# Altium PCB Termo_DISPLAY_CPU_10_1.PcbDoc (part 2 of 2)
Units mil, origin at the board's own origin, x right, y up, seen from the top; angles counter-clockwise.
Board outline 3356.49 x 1466.72 mil, 2 copper layers (Top Layer, Bottom Layer); 43 components, 32 nets, 183 pads, 62 vias.
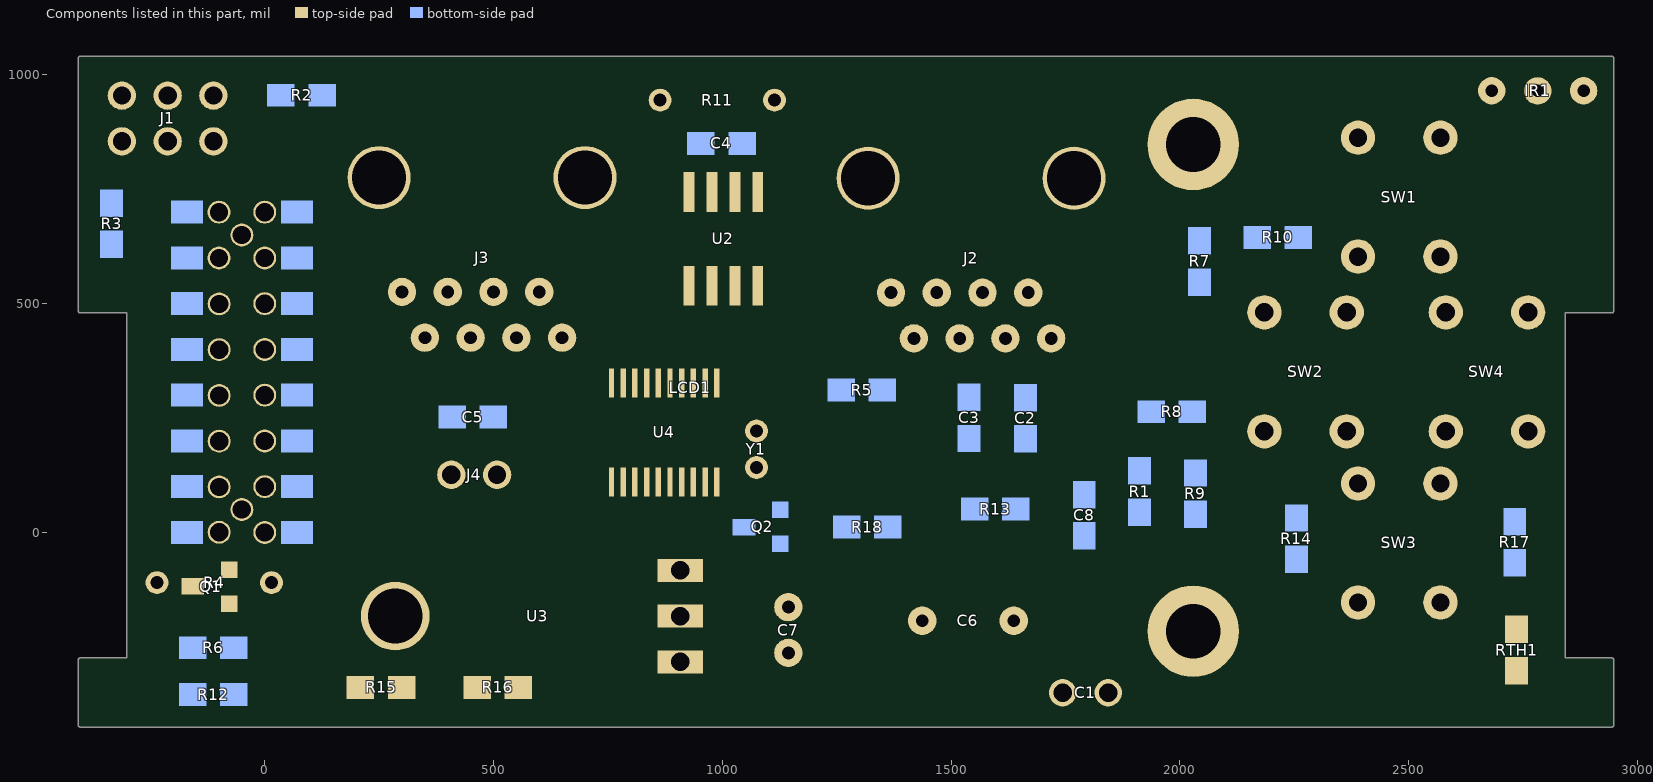
[diagram p2: the components of this part, seen from the top]

## Via types
v1: diameter 28, hole 14, Top Layer to Bottom Layer, 46 vias
v2: diameter 40, hole 20, Top Layer to Bottom Layer, 16 vias

## Nets (pads, with @x,y where several pads share a name; then routed paths per layer and width w, separated by ;. In a path a pad name is that pad's centre, name@x,y a point inside that pad or via, vN(x,y) a via of type N, cw(c..) or ccw(c..) an arc to the next point about the centre after c; other vN are vias at no path point) (continued)
copper on no net: | length 31434
  Bottom Layer w1: 2165.08,-316.72 2182.08,-316.72 ; 2165.08,-315.72 2182.08,-315.72 ; 2165.08,-314.72 2182.08,-314.72 ; 2165.08,-313.72 2182.08,-313.72 ; 2165.08,-312.72 2182.08,-312.72 ; 2165.08,-311.72 2182.08,-311.72 ; 2165.08,-310.72 2184.08,-310.72 ; 2165.08,-309.72 2184.08,-309.72 ; 2165.08,-308.72 2184.08,-308.72 ; 2165.08,-307.72 2184.08,-307.72 ; 2165.08,-306.72 2184.08,-306.72 ; 2168.08,-319.72 2169.08,-319.72 ; 2168.08,-318.72 2178.08,-318.72 ; 2168.08,-317.72 2178.08,-317.72 ; 2171.08,-305.72 2184.08,-305.72 ; 2171.08,-304.72 2184.08,-304.72 ; 2171.08,-303.72 2184.08,-303.72 ; 2171.08,-302.72 2184.08,-302.72 ; 2171.08,-301.72 2184.08,-301.72 ; 2171.08,-300.72 2184.08,-300.72 ; 2171.08,-299.72 2184.08,-299.72 ; 2171.08,-298.72 2184.08,-298.72 ; 2171.08,-297.72 2184.08,-297.72 ; 2171.08,-296.72 2184.08,-296.72 ; 2171.08,-295.72 2184.08,-295.72 ; 2171.08,-294.72 2184.08,-294.72 ; 2171.08,-293.72 2184.08,-293.72 ; 2171.08,-292.72 2184.08,-292.72 ; 2171.08,-291.72 2184.08,-291.72 ; 2171.08,-290.72 2184.08,-290.72 ; 2171.08,-289.72 2184.08,-289.72 ; 2171.08,-288.72 2184.08,-288.72 ; 2171.08,-287.72 2184.08,-287.72 ; 2171.08,-286.72 2184.08,-286.72 ; 2171.08,-285.72 2184.08,-285.72 ; 2171.08,-284.72 2184.08,-284.72 ; 2171.08,-283.72 2184.08,-283.72 ; 2171.08,-282.72 2184.08,-282.72 ; 2171.08,-281.72 2184.08,-281.72 ; 2171.08,-280.72 2184.08,-280.72 ; 2171.08,-279.72 2184.08,-279.72 ; 2171.08,-278.72 2184.08,-278.72 ; 2171.08,-277.72 2184.08,-277.72 ; 2171.08,-276.72 2184.08,-276.72 ; 2171.08,-275.72 2184.08,-275.72 ; 2171.08,-274.72 2184.08,-274.72 ; 2171.08,-273.72 2184.08,-273.72 ; 2171.08,-272.72 2184.08,-272.72 ; 2171.08,-271.72 2184.08,-271.72 ; 2171.08,-270.72 2184.08,-270.72 ; 2171.08,-269.72 2184.08,-269.72 ; 2171.08,-268.72 2184.08,-268.72 ; 2171.08,-267.72 2184.08,-267.72 ; 2171.08,-266.72 2184.08,-266.72 ; 2171.08,-265.72 2184.08,-265.72 ; 2171.08,-264.72 2184.08,-264.72 ; 2171.08,-263.72 2184.08,-263.72 ; 2171.08,-262.72 2184.08,-262.72 ; 2171.08,-261.72 2184.08,-261.72 ; 2171.08,-260.72 2184.08,-260.72 ; 2187.08,-306.72 2204.08,-306.72 ; 2187.08,-305.72 2202.08,-305.72 ; 2187.08,-304.72 2202.08,-304.72 ; 2187.08,-303.72 2200.08,-303.72 ; 2187.08,-302.72 2200.08,-302.72 ; 2187.08,-301.72 2200.08,-301.72 ; 2187.08,-300.72 2200.08,-300.72 ; 2187.08,-299.72 2200.08,-299.72 ; 2187.08,-298.72 2200.08,-298.72 ; 2187.08,-297.72 2200.08,-297.72 ; 2187.08,-296.72 2200.08,-296.72 ; 2187.08,-295.72 2200.08,-295.72 ; 2187.08,-294.72 2200.08,-294.72 ; 2187.08,-293.72 2200.08,-293.72 ; 2187.08,-292.72 2202.08,-292.72 ; 2187.08,-291.72 2202.08,-291.72 ; 2187.08,-290.72 2202.08,-290.72 ; 2189.08,-310.72 2224.08,-310.72 ; 2189.08,-309.72 2224.08,-309.72 ; 2189.08,-308.72 2224.08,-308.72 ; 2189.08,-307.72 2204.08,-307.72 ; 2189.08,-289.72 2202.08,-289.72 ; 2189.08,-288.72 2206.08,-288.72 ; 2189.08,-287.72 2206.08,-287.72 ; 2189.08,-286.72 2224.08,-286.72 ; 2191.08,-312.72 2222.08,-312.72 ; 2191.08,-311.72 2222.08,-311.72 ; 2191.08,-285.72 2222.08,-285.72 ; 2191.08,-284.72 2222.08,-284.72 ; 2191.08,-283.72 2222.08,-283.72 ; 2191.08,-282.72 2222.08,-282.72 ; 2193.08,-314.72 2220.08,-314.72 ; 2193.08,-313.72 2220.08,-313.72 ; 2193.08,-281.72 2218.08,-281.72 ; 2193.08,-280.72 2218.08,-280.72 ; 2195.08,-316.72 2218.08,-316.72 ; 2195.08,-315.72 2218.08,-315.72 ; 2197.08,-279.72 2216.08,-279.72 ; 2197.08,-278.72 2216.08,-278.72 ; 2201.08,-318.72 2212.08,-318.72 ; 2201.08,-317.72 2212.08,-317.72 ; 2207.08,-288.72 2224.08,-288.72 ; 2207.08,-287.72 2224.08,-287.72 ; 2209.08,-307.72 2224.08,-307.72 ; 2209.08,-306.72 2226.08,-306.72 ; 2211.08,-305.72 2226.08,-305.72 ; 2211.08,-304.72 2226.08,-304.72 ; 2211.08,-290.72 2226.08,-290.72 ; 2211.08,-289.72 2224.08,-289.72 ; 2213.08,-303.72 2226.08,-303.72 ; 2213.08,-302.72 2226.08,-302.72 ; 2213.08,-301.72 2226.08,-301.72 ; 2213.08,-300.72 2226.08,-300.72 ; 2213.08,-299.72 2226.08,-299.72 ; 2213.08,-298.72 2226.08,-298.72 ; 2213.08,-297.72 2226.08,-297.72 ; 2213.08,-296.72 2226.08,-296.72 ; 2213.08,-295.72 2226.08,-295.72 ; 2213.08,-294.72 2226.08,-294.72 ; 2213.08,-293.72 2226.08,-293.72 ; 2213.08,-292.72 2226.08,-292.72 ; 2213.08,-291.72 2226.08,-291.72 ; 2225.08,-284.72 2252.08,-284.72 ; 2225.08,-283.72 2252.08,-283.72 ; 2225.08,-282.72 2252.08,-282.72 ; 2225.08,-281.72 2252.08,-281.72 ; 2225.08,-280.72 2252.08,-280.72 ; 2225.08,-279.72 2238.08,-279.72 ; 2225.08,-278.72 2238.08,-278.72 ; 2227.08,-288.72 2252.08,-288.72 ; 2227.08,-287.72 2252.08,-287.72 ; 2227.08,-286.72 2252.08,-286.72 ; 2227.08,-285.72 2252.08,-285.72 ; 2237.08,-290.72 2252.08,-290.72 ; 2237.08,-289.72 2252.08,-289.72 ; 2239.08,-316.72 2252.08,-316.72 ; 2239.08,-315.72 2252.08,-315.72 ; 2239.08,-314.72 2252.08,-314.72 ; 2239.08,-313.72 2252.08,-313.72 ; 2239.08,-312.72 2252.08,-312.72 ; 2239.08,-311.72 2252.08,-311.72 ; 2239.08,-310.72 2252.08,-310.72 ; 2239.08,-309.72 2252.08,-309.72 ; 2239.08,-308.72 2252.08,-308.72 ; 2239.08,-307.72 2252.08,-307.72 ; 2239.08,-306.72 2252.08,-306.72 ; 2239.08,-305.72 2252.08,-305.72 ; 2239.08,-304.72 2252.08,-304.72 ; 2239.08,-303.72 2252.08,-303.72 ; 2239.08,-302.72 2252.08,-302.72 ; 2239.08,-301.72 2252.08,-301.72 ; 2239.08,-300.72 2252.08,-300.72 ; 2239.08,-299.72 2252.08,-299.72 ; 2239.08,-298.72 2252.08,-298.72 ; 2239.08,-297.72 2252.08,-297.72 ; 2239.08,-296.72 2252.08,-296.72 ; 2239.08,-295.72 2252.08,-295.72 ; 2239.08,-294.72 2252.08,-294.72 ; 2239.08,-293.72 2252.08,-293.72 ; 2239.08,-292.72 2252.08,-292.72 ; 2239.08,-291.72 2252.08,-291.72 ; 2241.08,-279.72 2252.08,-279.72 ; 2241.08,-278.72 2252.08,-278.72 ; 2253.08,-314.72 2278.08,-314.72 ; 2253.08,-313.72 2278.08,-313.72 ; 2253.08,-312.72 2278.08,-312.72 ; 2255.08,-311.72 2278.08,-311.72 ; 2255.08,-310.72 2278.08,-310.72 ; 2255.08,-309.72 2278.08,-309.72 ; 2255.08,-308.72 2278.08,-308.72 ; 2255.08,-307.72 2262.08,-307.72 ; 2255.08,-306.72 2262.08,-306.72 ; 2255.08,-284.72 2284.08,-284.72 ; 2255.08,-283.72 2284.08,-283.72 ; 2255.08,-282.72 2284.08,-282.72 ; 2255.08,-281.72 2284.08,-281.72 ; 2255.08,-280.72 2284.08,-280.72 ; 2255.08,-279.72 2284.08,-279.72 ; 2255.08,-278.72 2284.08,-278.72 ; 2257.08,-316.72 2276.08,-316.72 ; 2257.08,-315.72 2276.08,-315.72 ; 2257.08,-288.72 2284.08,-288.72 ; 2257.08,-287.72 2284.08,-287.72 ; 2257.08,-286.72 2284.08,-286.72 ; 2257.08,-285.72 2284.08,-285.72 ; 2261.08,-318.72 2272.08,-318.72 ; 2261.08,-317.72 2272.08,-317.72 ; 2265.08,-307.72 2278.08,-307.72 ; 2265.08,-306.72 2278.08,-306.72 ; 2265.08,-305.72 2278.08,-305.72 ; 2265.08,-304.72 2278.08,-304.72 ; 2265.08,-303.72 2278.08,-303.72 ; 2265.08,-302.72 2278.08,-302.72 ; 2265.08,-301.72 2278.08,-301.72 ; 2265.08,-300.72 2278.08,-300.72 ; 2265.08,-299.72 2278.08,-299.72 ; 2265.08,-298.72 2278.08,-298.72 ; 2265.08,-297.72 2278.08,-297.72 ; 2265.08,-296.72 2278.08,-296.72 ; 2265.08,-295.72 2278.08,-295.72 ; 2265.08,-294.72 2278.08,-294.72 ; 2265.08,-293.72 2278.08,-293.72 ; 2265.08,-292.72 2278.08,-292.72 ; 2265.08,-291.72 2278.08,-291.72 ; 2265.08,-290.72 2278.08,-290.72 ; 2265.08,-289.72 2278.08,-289.72 ; 2265.08,-277.72 2278.08,-277.72 ; 2265.08,-276.72 2278.08,-276.72 ; 2265.08,-275.72 2278.08,-275.72 ; 2265.08,-274.72 2278.08,-274.72 ; 2265.08,-273.72 2278.08,-273.72 ; 2265.08,-272.72 2278.08,-272.72 ; 2265.08,-271.72 2278.08,-271.72 ; 2265.08,-270.72 2278.08,-270.72 ; 2265.08,-269.72 2274.08,-269.72 ; 2265.08,-268.72 2274.08,-268.72 ; 2287.08,-316.72 2298.08,-316.72 ; 2287.08,-315.72 2298.08,-315.72 ; 2287.08,-314.72 2298.08,-314.72 ; 2287.08,-313.72 2298.08,-313.72 ; 2287.08,-312.72 2298.08,-312.72 ; 2287.08,-311.72 2298.08,-311.72 ; 2287.08,-310.72 2298.08,-310.72 ; 2287.08,-309.72 2298.08,-309.72 ; 2287.08,-308.72 2298.08,-308.72 ; 2287.08,-307.72 2298.08,-307.72 ; 2287.08,-306.72 2298.08,-306.72 ; 2287.08,-305.72 2298.08,-305.72 ; 2287.08,-304.72 2298.08,-304.72 ; 2287.08,-303.72 2298.08,-303.72 ; 2287.08,-302.72 2298.08,-302.72 ; 2287.08,-301.72 2298.08,-301.72 ; 2287.08,-300.72 2298.08,-300.72 ; 2287.08,-299.72 2298.08,-299.72 ; 2287.08,-298.72 2298.08,-298.72 ; 2287.08,-297.72 2298.08,-297.72 ; 2287.08,-296.72 2298.08,-296.72 ; 2287.08,-295.72 2298.08,-295.72 ; 2287.08,-294.72 2298.08,-294.72 ; 2287.08,-293.72 2298.08,-293.72 ; 2287.08,-292.72 2300.08,-292.72 ; 2287.08,-291.72 2300.08,-291.72 ; 2287.08,-290.72 2300.08,-290.72 ; 2287.08,-289.72 2300.08,-289.72 ; 2287.08,-288.72 2322.08,-288.72 ; 2287.08,-287.72 2322.08,-287.72 ; 2287.08,-286.72 2322.08,-286.72 ; 2287.08,-285.72 2322.08,-285.72 ; 2287.08,-284.72 2322.08,-284.72 ; 2289.08,-283.72 2322.08,-283.72 ; 2289.08,-282.72 2322.08,-282.72 ; 2289.08,-281.72 2322.08,-281.72 ; 2289.08,-280.72 2322.08,-280.72 ; 2293.08,-279.72 2308.08,-279.72 ; 2293.08,-278.72 2308.08,-278.72 ; 2307.08,-290.72 2322.08,-290.72 ; 2307.08,-289.72 2322.08,-289.72 ; 2311.08,-316.72 2322.08,-316.72 ; 2311.08,-315.72 2322.08,-315.72 ; 2311.08,-314.72 2322.08,-314.72 ; 2311.08,-313.72 2322.08,-313.72 ; 2311.08,-312.72 2322.08,-312.72 ; 2311.08,-311.72 2322.08,-311.72 ; 2311.08,-310.72 2322.08,-310.72 ; 2311.08,-309.72 2322.08,-309.72 ; 2311.08,-308.72 2322.08,-308.72 ; 2311.08,-307.72 2322.08,-307.72 ; 2311.08,-306.72 2322.08,-306.72 ; 2311.08,-305.72 2322.08,-305.72 ; 2311.08,-304.72 2322.08,-304.72 ; 2311.08,-303.72 2322.08,-303.72 ; 2311.08,-302.72 2322.08,-302.72 ; 2311.08,-301.72 2322.08,-301.72 ; 2311.08,-300.72 2322.08,-300.72 ; 2311.08,-299.72 2322.08,-299.72 ; 2311.08,-298.72 2322.08,-298.72 ; 2311.08,-297.72 2322.08,-297.72 ; 2311.08,-296.72 2322.08,-296.72 ; 2311.08,-295.72 2322.08,-295.72 ; 2311.08,-294.72 2322.08,-294.72 ; 2311.08,-293.72 2322.08,-293.72 ; 2311.08,-292.72 2322.08,-292.72 ; 2311.08,-291.72 2322.08,-291.72 ; 2311.08,-279.72 2322.08,-279.72 ; 2311.08,-278.72 2322.08,-278.72 ; 2327.08,-306.72 2344.08,-306.72 ; 2327.08,-305.72 2342.08,-305.72 ; 2327.08,-304.72 2342.08,-304.72 ; 2327.08,-303.72 2340.08,-303.72 ; 2327.08,-302.72 2340.08,-302.72 ; 2327.08,-301.72 2340.08,-301.72 ; 2327.08,-300.72 2340.08,-300.72 ; 2327.08,-299.72 2340.08,-299.72 ; 2327.08,-298.72 2340.08,-298.72 ; 2327.08,-297.72 2340.08,-297.72 ; 2327.08,-296.72 2340.08,-296.72 ; 2327.08,-295.72 2340.08,-295.72 ; 2327.08,-294.72 2340.08,-294.72 ; 2327.08,-293.72 2340.08,-293.72 ; 2327.08,-292.72 2340.08,-292.72 ; 2327.08,-291.72 2340.08,-291.72 ; 2327.08,-290.72 2342.08,-290.72 ; 2327.08,-289.72 2342.08,-289.72 ; 2327.08,-288.72 2346.08,-288.72 ; 2329.08,-310.72 2364.08,-310.72 ; 2329.08,-309.72 2364.08,-309.72 ; 2329.08,-308.72 2364.08,-308.72 ; 2329.08,-307.72 2344.08,-307.72 ; 2329.08,-287.72 2346.08,-287.72 ; 2329.08,-286.72 2364.08,-286.72 ; 2329.08,-285.72 2362.08,-285.72 ; 2329.08,-284.72 2362.08,-284.72 ; 2331.08,-312.72 2362.08,-312.72 ; 2331.08,-311.72 2362.08,-311.72 ; 2331.08,-283.72 2360.08,-283.72 ; 2331.08,-282.72 2360.08,-282.72 ; 2333.08,-314.72 2360.08,-314.72 ; 2333.08,-313.72 2360.08,-313.72 ; 2333.08,-281.72 2358.08,-281.72 ; 2333.08,-280.72 2358.08,-280.72 ; 2335.08,-316.72 2358.08,-316.72 ; 2335.08,-315.72 2358.08,-315.72 ; 2337.08,-279.72 2356.08,-279.72 ; 2337.08,-278.72 2356.08,-278.72 ; 2341.08,-318.72 2352.08,-318.72 ; 2341.08,-317.72 2352.08,-317.72 ; 2345.08,-244.72 2362.08,-244.72 ; 2345.08,-243.72 2382.08,-243.72 ; 2345.08,-242.72 2384.08,-242.72 ; 2345.08,-241.72 2384.08,-241.72 ; 2345.08,-240.72 2386.08,-240.72 ; 2347.08,-288.72 2364.08,-288.72 ; 2347.08,-287.72 2364.08,-287.72 ; 2347.08,-239.72 2386.08,-239.72 ; 2347.08,-238.72 2389.08,-238.72 ; 2347.08,-237.72 2390.08,-237.72 ; 2347.08,-236.72 2392.08,-236.72 ; 2348.7,-210.72 2419.7,-210.72 ; 2348.7,-209.72 2397.7,-209.72 ; 2348.7,-208.72 2397.7,-208.72 ; 2349.08,-307.72 2364.08,-307.72 ; 2349.08,-306.72 2366.08,-306.72 ; 2349.08,-235.72 2392.08,-235.72 ; 2349.08,-234.72 2396.08,-234.72 ; 2351.08,-305.72 2366.08,-305.72 ; 2351.08,-304.72 2366.08,-304.72 ; 2351.08,-292.72 2366.08,-292.72 ; 2351.08,-291.72 2366.08,-291.72 ; 2351.08,-290.72 2366.08,-290.72 ; 2351.08,-289.72 2364.08,-289.72 ; 2351.08,-233.72 2396.08,-233.72 ; 2351.08,-232.72 2400.08,-232.72 ; 2353.08,-303.72 2366.08,-303.72 ; 2353.08,-302.72 2366.08,-302.72 ; 2353.08,-301.72 2366.08,-301.72 ; 2353.08,-300.72 2366.08,-300.72 ; 2353.08,-299.72 2366.08,-299.72 ; 2353.08,-298.72 2366.08,-298.72 ; 2353.08,-297.72 2366.08,-297.72 ; 2353.08,-296.72 2366.08,-296.72 ; 2353.08,-295.72 2366.08,-295.72 ; 2353.08,-294.72 2366.08,-294.72 ; 2353.08,-293.72 2366.08,-293.72 ; 2353.08,-231.72 2400.08,-231.72 ; 2353.08,-230.72 2406.08,-230.72 ; 2357.08,-229.72 2406.08,-229.72 ; 2357.08,-228.72 2416.08,-228.72 ; 2359.08,-227.72 2416.08,-227.72 ; 2359.08,-226.72 2504.08,-226.72 ; 2361.08,-225.72 2500.08,-225.72 ; 2361.08,-224.72 2500.08,-224.72 ; 2365.08,-312.72 2403.08,-312.72 ; 2365.08,-311.72 2404.08,-311.72 ; 2365.08,-310.72 2404.08,-310.72 ; 2365.08,-223.72 2496.08,-223.72 ; 2365.08,-222.72 2496.08,-222.72 ; 2367.08,-314.72 2400.08,-314.72 ; 2367.08,-313.72 2400.08,-313.72 ; 2367.08,-309.72 2404.08,-309.72 ; 2367.08,-308.72 2406.08,-308.72 ; 2367.08,-307.72 2380.08,-307.72 ; 2367.08,-306.72 2380.08,-306.72 ; 2367.08,-276.72 2374.08,-276.72 ; 2367.08,-275.72 2374.08,-275.72 ; 2367.08,-274.72 2406.08,-274.72 ; 2367.08,-273.72 2404.08,-273.72 ; 2367.08,-272.72 2404.08,-272.72 ; 2367.08,-271.72 2402.08,-271.72 ; 2367.08,-270.72 2402.08,-270.72 ; 2367.08,-269.72 2400.08,-269.72 ; 2367.08,-268.72 2400.08,-268.72 ; 2367.08,-267.72 2398.08,-267.72 ; 2367.08,-266.72 2398.08,-266.72 ; 2367.08,-221.72 2492.08,-221.72 ; 2367.08,-220.72 2492.08,-220.72 ; 2368.08,-305.72 2374.08,-305.72 ; 2368.08,-304.72 2374.08,-304.72 ; 2369.08,-244.72 2372.08,-244.72 ; 2371.08,-316.72 2398.08,-316.72 ; 2371.08,-315.72 2398.08,-315.72 ; 2371.08,-265.72 2392.08,-265.72 ; 2371.08,-264.72 2392.08,-264.72 ; 2371.08,-219.72 2488.08,-219.72 ; 2371.08,-218.72 2488.08,-218.72 ; 2373.08,-244.72 2382.08,-244.72 ; 2375.08,-217.72 2482.08,-217.72 ; 2375.08,-216.72 2482.08,-216.72 ; 2377.08,-318.72 2390.08,-318.72 ; 2377.08,-317.72 2390.08,-317.72 ; 2381.08,-215.72 2478.08,-215.72 ; 2381.08,-214.72 2478.08,-214.72 ; 2385.08,-307.72 2406.08,-307.72 ; 2385.08,-306.72 2408.08,-306.72 ; 2387.08,-213.72 2472.08,-213.72 ; 2387.08,-212.72 2472.08,-212.72 ; 2389.08,-305.72 2408.08,-305.72 ; 2389.08,-304.72 2408.08,-304.72 ; 2389.08,-276.72 2408.08,-276.72 ; 2389.08,-275.72 2406.08,-275.72 ; 2391.08,-278.72 2408.08,-278.72 ; 2391.08,-277.72 2408.08,-277.72 ; 2393.08,-303.72 2408.08,-303.72 ; 2393.08,-302.72 2410.08,-302.72 ; 2393.08,-280.72 2410.08,-280.72 ; 2393.08,-279.72 2408.08,-279.72 ; 2393.08,-211.72 2464.08,-211.72 ; 2395.08,-301.72 2410.08,-301.72 ; 2395.08,-300.72 2410.08,-300.72 ; 2395.08,-299.72 2410.08,-299.72 ; 2395.08,-298.72 2410.08,-298.72 ; 2395.08,-284.72 2410.08,-284.72 ; 2395.08,-283.72 2410.08,-283.72 ; 2395.08,-282.72 2410.08,-282.72 ; 2395.08,-281.72 2410.08,-281.72 ; 2397.08,-297.72 2410.08,-297.72 ; 2397.08,-296.72 2410.08,-296.72 ; 2397.08,-295.72 2410.08,-295.72 ; 2397.08,-294.72 2410.08,-294.72 ; 2397.08,-293.72 2410.08,-293.72 ; 2397.08,-292.72 2410.08,-292.72 ; 2397.08,-291.72 2410.08,-291.72 ; 2397.08,-290.72 2410.08,-290.72 ; 2397.08,-289.72 2410.08,-289.72 ; 2397.08,-288.72 2410.08,-288.72 ; 2397.08,-287.72 2410.08,-287.72 ; 2397.08,-286.72 2410.08,-286.72 ; 2397.08,-285.72 2410.08,-285.72 ; 2419.08,-300.72 2456.08,-300.72 ; 2419.08,-299.72 2456.08,-299.72 ; 2419.08,-298.72 2456.08,-298.72 ; 2419.08,-297.72 2456.08,-297.72 ; 2419.08,-296.72 2456.08,-296.72 ; 2419.08,-295.72 2456.08,-295.72 ; 2419.08,-294.72 2456.08,-294.72 ; 2419.08,-293.72 2454.08,-293.72 ; 2419.08,-292.72 2454.08,-292.72 ; 2419.08,-291.72 2432.08,-291.72 ; 2419.08,-290.72 2434.08,-290.72 ; 2421.08,-314.72 2450.08,-314.72 ; 2421.08,-313.72 2450.08,-313.72 ; 2421.08,-312.72 2452.08,-312.72 ; 2421.08,-311.72 2452.08,-311.72 ; 2421.08,-310.72 2452.08,-310.72 ; 2421.08,-309.72 2452.08,-309.72 ; 2421.08,-308.72 2454.08,-308.72 ; 2421.08,-289.72 2434.08,-289.72 ; 2421.08,-288.72 2436.08,-288.72 ; 2421.08,-287.72 2436.08,-287.72 ; 2421.08,-286.72 2453.08,-286.72 ; 2423.08,-316.72 2446.08,-316.72 ; 2423.08,-315.72 2446.08,-315.72 ; 2423.08,-307.72 2430.08,-307.72 ; 2423.08,-306.72 2429.08,-306.72 ; 2423.08,-285.72 2452.08,-285.72 ; 2423.08,-284.72 2452.08,-284.72 ; 2423.08,-283.72 2450.08,-283.72 ; 2423.08,-282.72 2450.08,-282.72 ; 2425.08,-281.72 2448.08,-281.72 ; 2425.08,-280.72 2448.08,-280.72 ; 2429.08,-318.72 2442.08,-318.72 ; 2429.08,-317.72 2442.08,-317.72 ; 2429.08,-279.72 2446.08,-279.72 ; 2429.08,-278.72 2446.08,-278.72 ; 2437.08,-307.72 2454.08,-307.72 ; 2437.08,-306.72 2454.08,-306.72 ; 2439.08,-288.72 2454.08,-288.72 ; 2439.08,-287.72 2454.08,-287.72 ; 2441.08,-305.72 2454.08,-305.72 ; 2441.08,-304.72 2454.08,-304.72 ; 2441.08,-303.72 2454.08,-303.72 ; 2441.08,-302.72 2454.08,-302.72 ; 2441.08,-290.72 2454.08,-290.72 ; 2441.08,-289.72 2454.08,-289.72 ; 2443.08,-301.72 2454.08,-301.72 ; 2443.08,-291.72 2454.08,-291.72 ; 2447.08,-228.72 2508.08,-228.72 ; 2447.08,-227.72 2504.08,-227.72 ; 2453.08,-282.72 2480.08,-282.72 ; 2453.08,-281.72 2480.08,-281.72 ; 2453.08,-280.72 2480.08,-280.72 ; 2453.08,-279.72 2466.08,-279.72 ; 2453.08,-278.72 2466.08,-278.72 ; 2455.08,-286.72 2480.08,-286.72 ; 2455.08,-285.72 2480.08,-285.72 ; 2455.08,-284.72 2480.08,-284.72 ; 2455.08,-283.72 2480.08,-283.72 ; 2457.08,-288.72 2480.08,-288.72 ; 2457.08,-287.72 2480.08,-287.72 ; 2459.08,-230.72 2511.08,-230.72 ; 2459.08,-229.72 2508.08,-229.72 ; 2465.08,-290.72 2480.08,-290.72 ; 2465.08,-289.72 2480.08,-289.72 ; 2469.08,-316.72 2480.08,-316.72 ; 2469.08,-315.72 2480.08,-315.72 ; 2469.08,-314.72 2480.08,-314.72 ; 2469.08,-313.72 2480.08,-313.72 ; 2469.08,-312.72 2480.08,-312.72 ; 2469.08,-311.72 2480.08,-311.72 ; 2469.08,-310.72 2480.08,-310.72 ; 2469.08,-309.72 2480.08,-309.72 ; 2469.08,-308.72 2480.08,-308.72 ; 2469.08,-307.72 2480.08,-307.72 ; 2469.08,-306.72 2480.08,-306.72 ; 2469.08,-305.72 2480.08,-305.72 ; 2469.08,-304.72 2480.08,-304.72 ; 2469.08,-303.72 2480.08,-303.72 ; 2469.08,-302.72 2480.08,-302.72 ; 2469.08,-301.72 2480.08,-301.72 ; 2469.08,-300.72 2480.08,-300.72 ; 2469.08,-299.72 2480.08,-299.72 ; 2469.08,-298.72 2480.08,-298.72 ; 2469.08,-297.72 2480.08,-297.72 ; 2469.08,-296.72 2480.08,-296.72 ; 2469.08,-295.72 2480.08,-295.72 ; 2469.08,-294.72 2480.08,-294.72 ; 2469.08,-293.72 2480.08,-293.72 ; 2469.08,-292.72 2480.08,-292.72 ; 2469.08,-291.72 2480.08,-291.72 ; 2469.08,-279.72 2480.08,-279.72 ; 2469.08,-278.72 2480.08,-278.72 ; 2469.08,-232.72 2514.08,-232.72 ; 2469.08,-231.72 2512.08,-231.72 ; 2477.08,-234.72 2518.08,-234.72 ; 2477.08,-233.72 2514.08,-233.72 ; 2483.08,-236.72 2522.08,-236.72 ; 2483.08,-235.72 2518.08,-235.72 ; 2485.08,-270.72 2500.08,-270.72 ; 2485.08,-269.72 2500.08,-269.72 ; 2485.08,-268.72 2500.08,-268.72 ; 2485.08,-267.72 2500.08,-267.72 ; 2485.08,-266.72 2500.08,-266.72 ; 2487.08,-316.72 2500.08,-316.72 ; 2487.08,-315.72 2500.08,-315.72 ; 2487.08,-314.72 2500.08,-314.72 ; 2487.08,-313.72 2500.08,-313.72 ; 2487.08,-312.72 2500.08,-312.72 ; 2487.08,-311.72 2500.08,-311.72 ; 2487.08,-310.72 2500.08,-310.72 ; 2487.08,-309.72 2500.08,-309.72 ; 2487.08,-308.72 2500.08,-308.72 ; 2487.08,-307.72 2500.08,-307.72 ; 2487.08,-306.72 2500.08,-306.72 ; 2487.08,-305.72 2500.08,-305.72 ; 2487.08,-304.72 2500.08,-304.72 ; 2487.08,-303.72 2500.08,-303.72 ; 2487.08,-302.72 2500.08,-302.72 ; 2487.08,-301.72 2500.08,-301.72 ; 2487.08,-300.72 2500.08,-300.72 ; 2487.08,-299.72 2500.08,-299.72 ; 2487.08,-298.72 2500.08,-298.72 ; 2487.08,-297.72 2500.08,-297.72 ; 2487.08,-296.72 2500.08,-296.72 ; 2487.08,-295.72 2500.08,-295.72 ; 2487.08,-294.72 2500.08,-294.72 ; 2487.08,-293.72 2500.08,-293.72 ; 2487.08,-292.72 2500.08,-292.72 ; 2487.08,-291.72 2500.08,-291.72 ; 2487.08,-290.72 2500.08,-290.72 ; 2487.08,-289.72 2500.08,-289.72 ; 2487.08,-288.72 2500.08,-288.72 ; 2487.08,-287.72 2500.08,-287.72 ; 2487.08,-286.72 2500.08,-286.72 ; 2487.08,-285.72 2500.08,-285.72 ; 2487.08,-284.72 2500.08,-284.72 ; 2487.08,-283.72 2500.08,-283.72 ; 2487.08,-282.72 2500.08,-282.72 ; 2487.08,-281.72 2500.08,-281.72 ; 2487.08,-280.72 2500.08,-280.72 ; 2487.08,-279.72 2500.08,-279.72 ; 2487.08,-278.72 2500.08,-278.72 ; 2487.08,-274.72 2498.08,-274.72 ; 2487.08,-273.72 2498.08,-273.72 ; 2487.08,-272.72 2500.08,-272.72 ; 2487.08,-271.72 2500.08,-271.72 ; 2487.08,-265.72 2500.08,-265.72 ; 2487.08,-264.72 2500.08,-264.72 ; 2487.08,-263.72 2498.08,-263.72 ; 2488.08,-262.72 2498.08,-262.72 ; 2491.08,-238.72 2526.08,-238.72 ; 2491.08,-237.72 2522.08,-237.72 ; 2497.08,-240.72 2530.08,-240.72 ; 2497.08,-239.72 2526.08,-239.72 ; 2503.08,-316.72 2516.08,-316.72 ; 2503.08,-315.72 2516.08,-315.72 ; 2503.08,-314.72 2516.08,-314.72 ; 2503.08,-313.72 2516.08,-313.72 ; 2503.08,-312.72 2518.08,-312.72 ; 2503.08,-311.72 2518.08,-311.72 ; 2503.08,-310.72 2518.08,-310.72 ; 2505.08,-309.72 2518.08,-309.72 ; 2505.08,-308.72 2518.08,-308.72 ; 2505.08,-307.72 2518.08,-307.72 ; 2505.08,-306.72 2520.08,-306.72 ; 2505.08,-242.72 2534.08,-242.72 ; 2505.08,-241.72 2530.08,-241.72 ; 2507.08,-305.72 2520.08,-305.72 ; 2507.08,-304.72 2548.08,-304.72 ; 2507.08,-303.72 2548.08,-303.72 ; 2507.08,-302.72 2548.08,-302.72 ; 2507.08,-301.72 2546.08,-301.72 ; 2507.08,-300.72 2546.08,-300.72 ; 2509.08,-299.72 2546.08,-299.72 ; 2509.08,-298.72 2546.08,-298.72 ; 2509.08,-297.72 2544.08,-297.72 ; 2509.08,-296.72 2544.08,-296.72 ; 2511.08,-295.72 2544.08,-295.72 ; 2511.08,-294.72 2544.08,-294.72 ; 2511.08,-293.72 2524.08,-293.72 ; 2511.08,-292.72 2524.08,-292.72 ; 2511.08,-291.72 2524.08,-291.72 ; 2511.08,-290.72 2526.08,-290.72 ; 2511.08,-244.72 2536.08,-244.72 ; 2511.08,-243.72 2534.08,-243.72 ; 2513.08,-289.72 2526.08,-289.72 ; 2513.08,-288.72 2526.08,-288.72 ; 2513.08,-287.72 2526.08,-287.72 ; 2513.08,-286.72 2526.08,-286.72 ; 2515.08,-285.72 2526.08,-285.72 ; 2515.08,-284.72 2540.08,-284.72 ; 2515.08,-283.72 2540.08,-283.72 ; 2515.08,-282.72 2540.08,-282.72 ; 2515.08,-281.72 2538.08,-281.72 ; 2515.08,-280.72 2538.08,-280.72 ; 2517.08,-279.72 2538.08,-279.72 ; 2517.08,-278.72 2538.08,-278.72 ; 2517.08,-277.72 2538.08,-277.72 ; 2517.08,-276.72 2538.08,-276.72 ; 2517.08,-246.72 2540.08,-246.72 ; 2517.08,-245.72 2536.08,-245.72 ; 2519.08,-275.72 2536.08,-275.72 ; 2519.08,-274.72 2536.08,-274.72 ; 2519.08,-273.72 2536.08,-273.72 ; 2519.08,-272.72 2536.08,-272.72 ; 2519.08,-271.72 2534.08,-271.72 ; 2519.08,-270.72 2534.08,-270.72 ; 2521.08,-269.72 2534.08,-269.72 ; 2521.08,-268.72 2534.08,-268.72 ; 2521.08,-267.72 2534.08,-267.72 ; 2521.08,-266.72 2534.08,-266.72 ; 2522.08,-248.72 2544.08,-248.72 ; 2522.08,-247.72 2540.08,-247.72 ; 2523.08,-265.72 2532.08,-265.72 ; 2523.08,-264.72 2532.08,-264.72 ; 2525.08,-340.72 2538.08,-340.72 ; 2525.08,-339.72 2534.08,-339.72 ; 2525.08,-338.72 2534.08,-338.72 ; 2525.08,-337.72 2528.08,-337.72 ; 2525.08,-336.72 2528.08,-336.72 ; 2527.08,-250.72 2548.08,-250.72 ; 2527.08,-249.72 2544.08,-249.72 ; 2528.08,-285.72 2540.08,-285.72 ; 2529.08,-342.72 2544.08,-342.72 ; 2529.08,-341.72 2538.08,-341.72 ; 2529.08,-290.72 2542.08,-290.72 ; 2529.08,-289.72 2542.08,-289.72 ; 2529.08,-288.72 2542.08,-288.72 ; 2529.08,-287.72 2542.08,-287.72 ; 2529.08,-286.72 2542.08,-286.72 ; 2531.08,-293.72 2544.08,-293.72 ; 2531.08,-292.72 2544.08,-292.72 ; 2531.08,-291.72 2542.08,-291.72 ; 2533.08,-344.72 2548.08,-344.72 ; 2533.08,-343.72 2544.08,-343.72 ; 2533.08,-252.72 2552.08,-252.72 ; 2533.08,-251.72 2548.08,-251.72 ; 2535.08,-306.72 2548.08,-306.72 ; 2535.08,-305.72 2548.08,-305.72 ; 2537.08,-346.72 2554.08,-346.72 ; 2537.08,-345.72 2548.08,-345.72 ; 2537.08,-312.72 2552.08,-312.72 ; 2537.08,-311.72 2550.08,-311.72 ; 2537.08,-310.72 2550.08,-310.72 ; 2537.08,-309.72 2550.08,-309.72 ; 2537.08,-308.72 2550.08,-308.72 ; 2537.08,-307.72 2548.08,-307.72 ; 2539.08,-316.72 2552.08,-316.72 ; 2539.08,-315.72 2552.08,-315.72 ; 2539.08,-314.72 2552.08,-314.72 ; 2539.08,-313.72 2552.08,-313.72 ; 2539.08,-254.72 2556.08,-254.72 ; 2539.08,-253.72 2552.08,-253.72 ; 2541.08,-348.72 2560.08,-348.72 ; 2541.08,-347.72 2554.08,-347.72 ; 2543.08,-350.72 2564.08,-350.72 ; 2543.08,-349.72 2560.08,-349.72 ; 2543.08,-256.72 2558.08,-256.72 ; 2543.08,-255.72 2556.08,-255.72 ; 2547.08,-352.72 2570.08,-352.72 ; 2547.08,-351.72 2564.08,-351.72 ; 2549.08,-258.72 2562.08,-258.72 ; 2549.08,-257.72 2558.08,-257.72 ; 2551.08,-354.72 2576.08,-354.72 ; 2551.08,-353.72 2570.08,-353.72 ; 2553.08,-260.72 2566.08,-260.72 ; 2553.08,-259.72 2562.08,-259.72 ; 2555.08,-356.72 2582.08,-356.72 ; 2555.08,-355.72 2576.08,-355.72 ; 2559.08,-358.72 2588.08,-358.72 ; 2559.08,-357.72 2582.08,-357.72 ; 2559.08,-262.72 2566.08,-262.72 ; 2559.08,-261.72 2566.08,-261.72 ; 2563.08,-360.72 2594.08,-360.72 ; 2563.08,-359.72 2588.08,-359.72 ; 2565.08,-362.72 2602.08,-362.72 ; 2565.08,-361.72 2594.08,-361.72 ; 2569.08,-364.72 2608.08,-364.72 ; 2569.08,-363.72 2602.08,-363.72 ; 2569.08,-288.72 2642.08,-288.72 ; 2569.08,-287.72 2642.08,-287.72 ; 2569.08,-286.72 2642.08,-286.72 ; 2569.08,-285.72 2642.08,-285.72 ; 2569.08,-284.72 2642.08,-284.72 ; 2569.08,-283.72 2642.08,-283.72 ; 2569.08,-282.72 2642.08,-282.72 ; 2571.08,-308.72 2642.08,-308.72 ; 2571.08,-307.72 2642.08,-307.72 ; 2571.08,-306.72 2642.08,-306.72 ; 2571.08,-305.72 2642.08,-305.72 ; 2571.08,-304.72 2642.08,-304.72 ; 2571.08,-290.72 2642.08,-290.72 ; 2571.08,-289.72 2642.08,-289.72 ; 2571.08,-281.72 2642.08,-281.72 ; 2571.08,-280.72 2642.08,-280.72 ; 2571.08,-266.72 2642.08,-266.72 ; 2571.08,-265.72 2642.08,-265.72 ; 2571.08,-264.72 2642.08,-264.72 ; 2571.08,-263.72 2642.08,-263.72 ; 2571.08,-262.72 2642.08,-262.72 ; 2573.08,-366.72 2616.08,-366.72 ; 2573.08,-365.72 2608.08,-365.72 ; 2573.08,-303.72 2642.08,-303.72 ; 2573.08,-302.72 2642.08,-302.72 ; 2573.08,-301.72 2642.08,-301.72 ; 2573.08,-300.72 2642.08,-300.72 ; 2573.08,-292.72 2642.08,-292.72 ; 2573.08,-291.72 2642.08,-291.72 ; 2573.08,-279.72 2642.08,-279.72 ; 2573.08,-278.72 2642.08,-278.72 ; 2573.08,-270.72 2642.08,-270.72 ; 2573.08,-269.72 2642.08,-269.72 ; 2573.08,-268.72 2642.08,-268.72 ; 2573.08,-267.72 2642.08,-267.72 ; 2575.08,-310.72 2642.08,-310.72 ; 2575.08,-309.72 2642.08,-309.72 ; 2575.08,-299.72 2642.08,-299.72 ; 2575.08,-298.72 2642.08,-298.72 ; 2575.08,-297.72 2642.08,-297.72 ; 2575.08,-296.72 2642.08,-296.72 ; 2575.08,-294.72 2642.08,-294.72 ; 2575.08,-293.72 2642.08,-293.72 ; 2575.08,-277.72 2642.08,-277.72 ; 2575.08,-276.72 2642.08,-276.72 ; 2575.08,-274.72 2642.08,-274.72 ; 2575.08,-273.72 2642.08,-273.72 ; 2575.08,-272.72 2642.08,-272.72 ; 2575.08,-271.72 2642.08,-271.72 ; 2575.08,-261.72 2642.08,-261.72 ; 2575.08,-260.72 2642.08,-260.72 ; 2577.08,-368.72 2626.08,-368.72 ; 2577.08,-367.72 2616.08,-367.72 ; 2577.08,-295.72 2642.08,-295.72 ; 2577.08,-275.72 2642.08,-275.72 ; 2579.08,-312.72 2642.08,-312.72 ; 2579.08,-311.72 2642.08,-311.72 ; 2579.08,-259.72 2642.08,-259.72 ; 2579.08,-258.72 2642.08,-258.72 ; 2581.08,-370.72 2634.08,-370.72 ; 2581.08,-369.72 2626.08,-369.72 ; 2581.08,-326.72 2642.08,-326.72 ; 2581.08,-325.72 2642.08,-325.72 ; 2581.08,-324.72 2642.08,-324.72 ; 2581.08,-323.72 2642.08,-323.72 ; 2581.08,-322.72 2642.08,-322.72 ; 2581.08,-321.72 2642.08,-321.72 ; 2581.08,-320.72 2642.08,-320.72 ; 2581.08,-319.72 2642.08,-319.72 ; 2581.08,-318.72 2642.08,-318.72 ; 2581.08,-317.72 2642.08,-317.72 ; 2581.08,-316.72 2642.08,-316.72 ; 2581.08,-314.72 2642.08,-314.72 ; 2581.08,-313.72 2642.08,-313.72 ; 2581.08,-252.72 2642.08,-252.72 ; 2581.08,-251.72 2642.08,-251.72 ; 2581.08,-250.72 2642.08,-250.72 ; 2581.08,-249.72 2642.08,-249.72 ; 2581.08,-248.72 2642.08,-248.72 ; 2581.08,-247.72 2642.08,-247.72 ; 2581.08,-246.72 2642.08,-246.72 ; 2581.08,-245.72 2642.08,-245.72 ; 2581.08,-244.72 2642.08,-244.72 ; 2583.08,-328.72 2642.08,-328.72 ; 2583.08,-327.72 2642.08,-327.72 ; 2583.08,-315.72 2642.08,-315.72 ; 2583.08,-257.72 2642.08,-257.72 ; 2583.08,-256.72 2642.08,-256.72 ; 2583.08,-255.72 2642.08,-255.72 ; 2583.08,-254.72 2642.08,-254.72 ; 2583.08,-253.72 2642.08,-253.72 ; 2585.08,-372.72 2648.08,-372.72 ; 2585.08,-371.72 2634.08,-371.72 ; 2585.08,-243.72 2642.08,-243.72 ; 2585.08,-242.72 2642.08,-242.72 ; 2587.08,-374.72 2730.08,-374.72 ; 2588.08,-375.72 2589.08,-375.72 ; 2589.08,-373.72 2648.08,-373.72 ; 2591.08,-376.72 2728.08,-376.72 ; 2591.08,-375.72 2728.08,-375.72 ; 2593.08,-334.72 2642.08,-334.72 ; 2593.08,-333.72 2642.08,-333.72 ; 2593.08,-332.72 2642.08,-332.72 ; 2593.08,-331.72 2642.08,-331.72 ; 2593.08,-330.72 2642.08,-330.72 ; 2593.08,-329.72 2642.08,-329.72 ; 2593.08,-241.72 2642.08,-241.72 ; 2593.08,-240.72 2642.08,-240.72 ; 2593.08,-239.72 2642.08,-239.72 ; 2593.08,-238.72 2642.08,-238.72 ; 2595.08,-378.72 2724.08,-378.72 ; 2595.08,-377.72 2724.08,-377.72 ; 2595.08,-342.72 2642.08,-342.72 ; 2595.08,-341.72 2642.08,-341.72 ; 2595.08,-340.72 2642.08,-340.72 ; 2595.08,-339.72 2642.08,-339.72 ; 2595.08,-338.72 2642.08,-338.72 ; 2595.08,-337.72 2642.08,-337.72 ; 2595.08,-336.72 2642.08,-336.72 ; 2595.08,-335.72 2642.08,-335.72 ; 2595.08,-237.72 2642.08,-237.72 ; 2595.08,-236.72 2642.08,-236.72 ; 2595.08,-235.72 2642.08,-235.72 ; 2595.08,-234.72 2642.08,-234.72 ; 2595.08,-233.72 2642.08,-233.72 ; 2595.08,-232.72 2642.08,-232.72 ; 2595.08,-231.72 2642.08,-231.72 ; 2595.08,-230.72 2642.08,-230.72 ; 2595.08,-229.72 2604.08,-229.72 ; 2595.08,-228.72 2604.08,-228.72 ; 2596.08,-379.72 2597.08,-379.72 ; 2601.08,-380.72 2722.08,-380.72 ; 2601.08,-379.72 2722.08,-379.72 ; 2605.08,-382.72 2718.08,-382.72 ; 2605.08,-381.72 2718.08,-381.72 ; 2609.08,-384.72 2714.08,-384.72 ; 2609.08,-383.72 2714.08,-383.72 ; 2609.08,-346.72 2642.08,-346.72 ; 2609.08,-345.72 2642.08,-345.72 ; 2609.08,-344.72 2642.08,-344.72 ; 2609.08,-343.72 2642.08,-343.72 ; 2609.08,-229.72 2642.08,-229.72 ; 2609.08,-228.72 2642.08,-228.72 ; 2609.08,-227.72 2642.08,-227.72 ; 2609.08,-226.72 2642.08,-226.72 ; 2611.08,-350.72 2626.08,-350.72 ; 2611.08,-349.72 2626.08,-349.72 ; 2611.08,-348.72 2642.08,-348.72 ; 2611.08,-347.72 2642.08,-347.72 ; 2611.08,-225.72 2642.08,-225.72 ; 2611.08,-224.72 2642.08,-224.72 ; 2611.08,-223.72 2642.08,-223.72 ; 2611.08,-222.72 2642.08,-222.72 ; 2613.08,-352.72 2620.08,-352.72 ; 2613.08,-351.72 2620.08,-351.72 ; 2613.08,-221.72 2624.08,-221.72 ; 2613.08,-220.72 2624.08,-220.72 ; 2613.08,-219.72 2620.08,-219.72 ; 2613.08,-218.72 2620.08,-218.72 ; 2615.08,-386.72 2708.08,-386.72 ; 2615.08,-385.72 2708.08,-385.72 ; 2621.08,-388.72 2702.08,-388.72 ; 2621.08,-387.72 2702.08,-387.72 ; 2627.08,-350.72 2642.08,-350.72 ; 2627.08,-349.72 2642.08,-349.72 ; 2627.08,-221.72 2642.08,-221.72 ; 2627.08,-220.72 2642.08,-220.72 ; 2629.08,-390.72 2694.08,-390.72 ; 2629.08,-389.72 2694.08,-389.72 ; 2629.08,-352.72 2642.08,-352.72 ; 2629.08,-351.72 2642.08,-351.72 ; 2629.08,-219.72 2642.08,-219.72 ; 2629.08,-218.72 2642.08,-218.72 ; 2631.08,-356.72 2640.08,-356.72 ; 2631.08,-355.72 2640.08,-355.72 ; 2631.08,-354.72 2642.08,-354.72 ; 2631.08,-353.72 2642.08,-353.72 ; 2631.08,-217.72 2642.08,-217.72 ; 2631.08,-216.72 2642.08,-216.72 ; 2633.08,-358.72 2638.08,-358.72 ; 2633.08,-357.72 2638.08,-357.72 ; 2633.08,-215.72 2640.08,-215.72 ; 2633.08,-214.72 2640.08,-214.72 ; 2649.08,-392.72 2658.08,-392.72 ; 2649.08,-391.72 2682.08,-391.72 ; 2649.08,-322.72 2652.08,-322.72 ; 2649.08,-321.72 2652.08,-321.72 ; 2649.08,-320.72 2654.08,-320.72 ; 2649.08,-319.72 2654.08,-319.72 ; 2649.08,-318.72 2656.08,-318.72 ; 2649.08,-317.72 2656.08,-317.72 ; 2649.08,-316.72 2656.08,-316.72 ; 2649.08,-315.72 2656.08,-315.72 ; 2649.08,-314.72 2690.08,-314.72 ; 2649.08,-313.72 2674.08,-313.72 ; 2649.08,-312.72 2674.08,-312.72 ; 2649.08,-311.72 2672.08,-311.72 ; 2649.08,-310.72 2672.08,-310.72 ; 2649.08,-309.72 2670.08,-309.72 ; 2649.08,-308.72 2670.08,-308.72 ; 2649.08,-307.72 2670.08,-307.72 ; 2649.08,-306.72 2682.08,-306.72 ; 2649.08,-305.72 2682.08,-305.72 ; 2649.08,-304.72 2682.08,-304.72 ; 2649.08,-303.72 2682.08,-303.72 ; 2649.08,-302.72 2682.08,-302.72 ; 2649.08,-301.72 2682.08,-301.72 ; 2649.08,-300.72 2682.08,-300.72 ; 2649.08,-299.72 2680.08,-299.72 ; 2649.08,-298.72 2680.08,-298.72 ; 2649.08,-297.72 2680.08,-297.72 ; 2649.08,-296.72 2680.08,-296.72 ; 2649.08,-295.72 2678.08,-295.72 ; 2649.08,-294.72 2678.08,-294.72 ; 2649.08,-293.72 2677.08,-293.72 ; 2649.08,-292.72 2718.08,-292.72 ; 2649.08,-291.72 2719.08,-291.72 ; 2649.08,-290.72 2720.08,-290.72 ; 2649.08,-289.72 2720.08,-289.72 ; 2649.08,-288.72 2720.08,-288.72 ; 2649.08,-287.72 2720.08,-287.72 ; 2649.08,-286.72 2720.08,-286.72 ; 2649.08,-285.72 2720.08,-285.72 ; 2649.08,-284.72 2720.08,-284.72 ; 2649.08,-283.72 2720.08,-283.72 ; 2649.08,-282.72 2720.08,-282.72 ; 2649.08,-281.72 2720.08,-281.72 ; 2649.08,-280.72 2720.08,-280.72 ; 2649.08,-279.72 2720.08,-279.72 ; 2649.08,-278.72 2720.08,-278.72 ; 2649.08,-277.72 2720.08,-277.72 ; 2649.08,-276.72 2720.08,-276.72 ; 2649.08,-275.72 2678.08,-275.72 ; 2649.08,-274.72 2680.08,-274.72 ; 2649.08,-273.72 2680.08,-273.72 ; 2649.08,-272.72 2680.08,-272.72 ; 2649.08,-271.72 2680.08,-271.72 ; 2649.08,-270.72 2682.08,-270.72 ; 2649.08,-269.72 2682.08,-269.72 ; 2649.08,-268.72 2682.08,-268.72 ; 2649.08,-267.72 2682.08,-267.72 ; 2649.08,-266.72 2684.08,-266.72 ; 2649.08,-265.72 2684.08,-265.72 ; 2649.08,-264.72 2684.08,-264.72 ; 2649.08,-263.72 2670.08,-263.72 ; 2649.08,-262.72 2670.08,-262.72 ; 2649.08,-261.72 2670.08,-261.72 ; 2649.08,-260.72 2672.08,-260.72 ; 2649.08,-259.72 2672.08,-259.72 ; 2649.08,-258.72 2672.08,-258.72 ; 2649.08,-257.72 2672.08,-257.72 ; 2649.08,-256.72 2690.08,-256.72 ; 2649.08,-255.72 2690.08,-255.72 ; 2649.08,-254.72 2690.08,-254.72 ; 2649.08,-253.72 2654.08,-253.72 ; 2649.08,-252.72 2654.08,-252.72 ; 2649.08,-251.72 2652.08,-251.72 ; 2649.08,-250.72 2652.08,-250.72 ; 2651.08,-236.72 2685.08,-236.72 ; 2651.08,-235.72 2685.08,-235.72 ; 2651.08,-234.72 2686.08,-234.72 ; 2651.08,-233.72 2686.08,-233.72 ; 2651.08,-232.72 2688.08,-232.72 ; 2653.08,-338.72 2688.08,-338.72 ; 2653.08,-337.72 2686.08,-337.72 ; 2653.08,-336.72 2686.08,-336.72 ; 2653.08,-335.72 2686.08,-335.72 ; 2653.08,-334.72 2700.08,-334.72 ; 2653.08,-240.72 2698.08,-240.72 ; 2653.08,-239.72 2698.08,-239.72 ; 2653.08,-238.72 2698.08,-238.72 ; 2653.08,-237.72 2684.08,-237.72 ; 2653.08,-231.72 2688.08,-231.72 ; 2653.08,-230.72 2688.08,-230.72 ; 2653.08,-229.72 2688.08,-229.72 ; 2653.08,-228.72 2690.08,-228.72 ; 2655.08,-340.72 2690.08,-340.72 ; 2655.08,-339.72 2688.08,-339.72 ; 2655.08,-333.72 2700.08,-333.72 ; 2655.08,-332.72 2700.08,-332.72 ; 2655.08,-331.72 2698.08,-331.72 ; 2655.08,-330.72 2698.08,-330.72 ; 2655.08,-242.72 2698.08,-242.72 ; 2655.08,-241.72 2698.08,-241.72 ; 2655.08,-227.72 2670.08,-227.72 ; 2655.08,-226.72 2670.08,-226.72 ; 2657.08,-344.72 2672.08,-344.72 ; 2657.08,-343.72 2672.08,-343.72 ; 2657.08,-342.72 2690.08,-342.72 ; 2657.08,-341.72 2690.08,-341.72 ; 2657.08,-329.72 2698.08,-329.72 ; 2657.08,-328.72 2698.08,-328.72 ; 2657.08,-327.72 2696.08,-327.72 ; 2657.08,-326.72 2696.08,-326.72 ; 2657.08,-318.72 2692.08,-318.72 ; 2657.08,-317.72 2690.08,-317.72 ; 2657.08,-316.72 2690.08,-316.72 ; 2657.08,-315.72 2690.08,-315.72 ; 2657.08,-253.72 2690.08,-253.72 ; 2657.08,-252.72 2692.08,-252.72 ; 2657.08,-246.72 2696.08,-246.72 ; 2657.08,-245.72 2696.08,-245.72 ; 2657.08,-244.72 2696.08,-244.72 ; 2657.08,-243.72 2696.08,-243.72 ; 2657.08,-225.72 2668.08,-225.72 ; 2657.08,-224.72 2668.08,-224.72 ; 2657.08,-223.72 2668.08,-223.72 ; 2657.08,-222.72 2668.08,-222.72 ; 2659.08,-392.72 2682.08,-392.72 ; 2659.08,-348.72 2670.08,-348.72 ; 2659.08,-347.72 2670.08,-347.72 ; 2659.08,-346.72 2672.08,-346.72 ; 2659.08,-345.72 2672.08,-345.72 ; 2659.08,-325.72 2696.08,-325.72 ; 2659.08,-324.72 2696.08,-324.72 ; 2659.08,-323.72 2694.08,-323.72 ; 2659.08,-322.72 2694.08,-322.72 ; 2659.08,-321.72 2692.08,-321.72 ; 2659.08,-320.72 2692.08,-320.72 ; 2659.08,-319.72 2692.08,-319.72 ; 2659.08,-251.72 2692.08,-251.72 ; 2659.08,-250.72 2692.08,-250.72 ; 2659.08,-249.72 2692.08,-249.72 ; 2659.08,-248.72 2694.08,-248.72 ; 2659.08,-247.72 2694.08,-247.72 ; 2659.08,-221.72 2666.08,-221.72 ; 2659.08,-220.72 2666.08,-220.72 ; 2659.08,-219.72 2666.08,-219.72 ; 2659.08,-218.72 2666.08,-218.72 ; 2661.08,-350.72 2670.08,-350.72 ; 2661.08,-349.72 2670.08,-349.72 ; 2662.08,-217.72 2664.08,-217.72 ; 2662.08,-216.72 2664.08,-216.72 ; 2663.08,-354.72 2668.08,-354.72 ; 2663.08,-353.72 2668.08,-353.72 ; 2663.08,-352.72 2668.08,-352.72 ; 2663.08,-351.72 2668.08,-351.72 ; 2669.08,-373.72 2730.08,-373.72 ; 2669.08,-372.72 2734.08,-372.72 ; 2671.08,-227.72 2690.08,-227.72 ; 2671.08,-226.72 2690.08,-226.72 ; 2673.08,-346.72 2692.08,-346.72 ; 2673.08,-345.72 2692.08,-345.72 ; 2673.08,-344.72 2692.08,-344.72 ; 2673.08,-343.72 2690.08,-343.72 ; 2673.08,-225.72 2690.08,-225.72 ; 2673.08,-224.72 2690.08,-224.72 ; 2675.08,-350.72 2690.08,-350.72 ; 2675.08,-349.72 2690.08,-349.72 ; 2675.08,-348.72 2692.08,-348.72 ; 2675.08,-347.72 2692.08,-347.72 ; 2675.08,-223.72 2688.08,-223.72 ; 2675.08,-222.72 2688.08,-222.72 ; 2675.08,-221.72 2684.08,-221.72 ; 2675.08,-220.72 2684.08,-220.72 ; 2677.08,-353.72 2684.08,-353.72 ; 2677.08,-352.72 2687.08,-352.72 ; 2677.08,-351.72 2688.08,-351.72 ; 2677.08,-219.72 2680.08,-219.72 ; 2677.08,-218.72 2680.08,-218.72 ; 2679.08,-354.72 2684.08,-354.72 ; 2681.08,-371.72 2734.08,-371.72 ; 2681.08,-370.72 2736.08,-370.72 ; 2681.08,-218.72 2682.08,-218.72 ; 2682.08,-293.72 2683.08,-293.72 ; 2685.08,-296.72 2710.08,-296.72 ; 2685.08,-295.72 2708.08,-295.72 ; 2685.08,-294.72 2708.08,-294.72 ; 2685.08,-293.72 2708.08,-293.72 ; 2687.08,-369.72 2736.08,-369.72 ; 2687.08,-368.72 2738.08,-368.72 ; 2687.08,-298.72 2710.08,-298.72 ; 2687.08,-297.72 2710.08,-297.72 ; 2687.08,-275.72 2710.08,-275.72 ; 2687.08,-274.72 2710.08,-274.72 ; 2687.08,-273.72 2710.08,-273.72 ; 2687.08,-272.72 2712.08,-272.72 ; 2689.08,-302.72 2712.08,-302.72 ; 2689.08,-301.72 2712.08,-301.72 ; 2689.08,-300.72 2712.08,-300.72 ; 2689.08,-299.72 2710.08,-299.72 ; 2689.08,-271.72 2712.08,-271.72 ; 2689.08,-270.72 2712.08,-270.72 ; 2689.08,-269.72 2712.08,-269.72 ; 2689.08,-268.72 2714.08,-268.72 ; 2691.08,-306.72 2714.08,-306.72 ; 2691.08,-305.72 2714.08,-305.72 ; 2691.08,-304.72 2714.08,-304.72 ; 2691.08,-303.72 2712.08,-303.72 ; 2691.08,-267.72 2714.08,-267.72 ; 2691.08,-266.72 2714.08,-266.72 ; 2693.08,-367.72 2738.08,-367.72 ; 2693.08,-366.72 2740.08,-366.72 ; 2693.08,-265.72 2712.08,-265.72 ; 2693.08,-264.72 2712.08,-264.72 ; 2697.08,-365.72 2740.08,-365.72 ; 2697.08,-364.72 2742.08,-364.72 ; 2701.08,-363.72 2742.08,-363.72 ; 2701.08,-362.72 2744.08,-362.72 ; 2703.08,-361.72 2744.08,-361.72 ; 2703.08,-360.72 2746.08,-360.72 ; 2705.08,-359.72 2746.08,-359.72 ; 2705.08,-358.72 2746.08,-358.72 ; 2707.08,-357.72 2746.08,-357.72 ; 2707.08,-356.72 2721.08,-356.72 ; 2713.08,-265.72 2714.08,-265.72 ; 2713.08,-264.72 2714.08,-264.72 ; 2722.08,-356.72 2740.08,-356.72 ; 2743.08,-356.72 2746.08,-356.72

## Keep-outs
Keep-Out Layer:
  rectangle: 1908.28,724.91 2153.28,969.91
  rectangle: 1908.28,-345.96 2148.28,-85.96

## Other copper
Bottom Layer:
  rectangle: 144.5,-412.89 774.42,43.81
  rectangle: 1125.98,110.24 1472.44,251.97

## Silkscreen, mask and mechanical layers (free items; w line width, h text height)
Top Overlay:
  lines w10: -402.75,-420.76 2943.71,-420.76 2943.71,-279.03 2837.41,-279.03 2837.41,484.75 2943.71,484.75 2943.71,1035.93 -402.75,1035.93 -402.75,484.75 -296.45,484.75 -296.45,-279.03 -402.75,-279.03 -402.75,-420.76
Bottom Solder:
  rectangle: 1334.65,110.24 1472.44,251.97